# EAGLE board boardpov (EAGLE 8.4.0)

Size 225 x 38 mm. Coordinates in mm from the lower left corner, seen from the top.
Outline: 0,0 225,0 225,38 0,38 0,0
Copper layers (1*16): Top 0.035mm / dielectric 1.5mm / Bottom 0.035mm
Design rules "default": minimum track width 6mil, minimum drill 0.35mm, track to track 6mil, track to pad 6mil, pad to pad 6mil, via to via 6mil, smd to smd 6mil, copper to edge 40mil, drill to drill 6mil, minimum pad ring 10mil, minimum via ring 8mil, stop-mask expansion 4mil, vias tented up to drill 0mil, thermal gap 10mil

## Footprints (pad centres in the part's own frame; a part is rotated, then mirrored left to right if it is on the bottom)
C025-025X050 = drill 0.813 pad 1.676 octagon: 1 -1.27,0; 2 1.27,0
1X02 = drill 1.016 pad 1.88: 1 0,0; 2 2.54,0
1X03 = drill 1.016 long: 1 -2.54,0; 2 0,0; 3 2.54,0
1X06-CLEANBIG = drill 1.016 pad 1.778 octagon: 1 -6.35,0; 2 -3.81,0; 3 -1.27,0; 4 1.27,0; 5 3.81,0; 6 6.35,0
PHOTON = drill 1.016 pad 1.88: 1 1.27,32.258; 2 1.27,29.718; 3 1.27,27.178; 4 1.27,24.638; 5 1.27,22.098; 6 1.27,19.558; 7 1.27,17.018; 8 1.27,14.478; 9 1.27,11.938; 10 1.27,9.398; 11 1.27,6.858; 12 1.27,4.318; 13 19.05,4.318; 14 19.05,6.858; 15 19.05,9.398; 16 19.05,11.938; 17 19.05,14.478; 18 19.05,17.018; 19 19.05,19.558; 20 19.05,22.098; 21 19.05,24.638; 22 19.05,27.178; 23 19.05,29.718; 24 19.05,32.258
APA102-2020 = smd 0.8 x 0.3 bottom: CK0 2.14,1.27; CKL 0.4,1.27 | smd 0.8 x 0.5 bottom: GND 0.4,2.14; SD0 2.14,0.4; SD1 0.4,0.4; VDD 2.14,2.14 | smd 0.5 x 1.48: GND- 1.27,0.7 | smd 0.5 x 1: VDD+ 1.27,2.14

## Placement (x,y rotation side)
C1  [C025-025X050]  220.2,5.4 90 top
J1  [1X02]  8.9,-13.7 0 top  (outside the outline)
JP1  [1X03]  219.7,30.5 270 top
JP2  [1X06-CLEANBIG]  213.64,13.04 180 top
JP5  [1X06-CLEANBIG]  213.64,23.2 180 top
U$1  PHOTON_WITH_HEADERS  [PHOTON]  41.08,8.89 90 top
U$2  APA102-202020-20  [APA102-2020]  206.4,17.3 0 top
U$3  APA102-202020-20  [APA102-2020]  201.9,17.3 0 top
U$4  APA102-202020-20  [APA102-2020]  197.4,17.3 0 top
U$5  APA102-202020-20  [APA102-2020]  192.9,17.3 0 top
U$6  APA102-202020-20  [APA102-2020]  188.4,17.3 0 top
U$7  APA102-202020-20  [APA102-2020]  183.9,17.3 0 top
U$8  APA102-202020-20  [APA102-2020]  179.4,17.3 0 top
U$9  APA102-202020-20  [APA102-2020]  174.9,17.3 0 top
U$10  APA102-202020-20  [APA102-2020]  170.4,17.3 0 top
U$11  APA102-202020-20  [APA102-2020]  165.9,17.3 0 top
U$12  APA102-202020-20  [APA102-2020]  161.4,17.3 0 top
U$13  APA102-202020-20  [APA102-2020]  156.9,17.3 0 top
U$14  APA102-202020-20  [APA102-2020]  152.4,17.3 0 top
U$15  APA102-202020-20  [APA102-2020]  147.9,17.3 0 top
U$16  APA102-202020-20  [APA102-2020]  143.4,17.3 0 top
U$17  APA102-202020-20  [APA102-2020]  138.9,17.3 0 top
U$18  APA102-202020-20  [APA102-2020]  134.4,17.3 0 top
U$19  APA102-202020-20  [APA102-2020]  129.9,17.3 0 top
U$20  APA102-202020-20  [APA102-2020]  125.4,17.3 0 top
U$21  APA102-202020-20  [APA102-2020]  120.9,17.3 0 top
U$22  APA102-202020-20  [APA102-2020]  116.4,17.3 0 top
U$23  APA102-202020-20  [APA102-2020]  111.9,17.3 0 top
U$24  APA102-202020-20  [APA102-2020]  107.4,17.3 0 top
U$25  APA102-202020-20  [APA102-2020]  102.9,17.3 0 top
U$26  APA102-202020-20  [APA102-2020]  98.4,17.3 0 top
U$27  APA102-202020-20  [APA102-2020]  93.9,17.3 0 top
U$28  APA102-202020-20  [APA102-2020]  89.4,17.3 0 top
U$29  APA102-202020-20  [APA102-2020]  84.9,17.3 0 top
U$30  APA102-202020-20  [APA102-2020]  80.4,17.3 0 top
U$31  APA102-202020-20  [APA102-2020]  75.9,17.3 0 top
U$41  APA102-202020-20  [APA102-2020]  219.9,17.3 0 top
U$42  APA102-202020-20  [APA102-2020]  215.4,17.3 0 top
U$43  APA102-202020-20  [APA102-2020]  210.9,17.3 0 top
U$44  APA102-202020-20  [APA102-2020]  71.4,17.3 0 top
U$45  APA102-202020-20  [APA102-2020]  66.9,17.3 0 top
U$46  APA102-202020-20  [APA102-2020]  62.4,17.3 0 top
U$47  APA102-202020-20  [APA102-2020]  57.9,17.3 0 top
U$48  APA102-202020-20  [APA102-2020]  53.4,17.3 0 top
U$49  APA102-202020-20  [APA102-2020]  48.9,17.3 0 top

## Library data of the parts
C1 JP2 JP5 = adafruit
J1 = SparkFun-Connectors
JP1 = pinhead
U$1 = Spark
U$2-U$31 U$41-U$49 = POVPARTS

## Nets
3V3: U$1.24
N$1: J1.2 U$1.1
N$2: J1.1 U$1.2 U$1.21 U$2.GND U$2.GND- U$3.GND U$3.GND- U$4.GND U$4.GND- U$5.GND U$5.GND- U$6.GND U$6.GND- U$7.GND U$7.GND- U$8.GND U$8.GND- U$9.GND U$9.GND- U$10.GND U$10.GND- U$11.GND U$11.GND- U$12.GND U$12.GND- U$13.GND U$13.GND- U$14.GND U$14.GND- U$15.GND U$15.GND- U$16.GND U$16.GND- U$17.GND U$17.GND- U$18.GND U$18.GND- U$19.GND U$19.GND- U$20.GND U$20.GND- U$21.GND U$21.GND- U$22.GND U$22.GND- U$23.GND U$23.GND- U$24.GND U$24.GND- U$25.GND U$25.GND- U$26.GND U$26.GND- U$27.GND U$27.GND- U$28.GND U$28.GND- U$29.GND U$29.GND- U$30.GND U$30.GND- U$31.GND U$31.GND- U$41.GND U$41.GND- U$42.GND U$42.GND- U$43.GND U$43.GND- U$44.GND U$44.GND- U$45.GND U$45.GND- U$46.GND U$46.GND- U$47.GND U$47.GND- U$48.GND U$48.GND- U$49.GND U$49.GND-
N$3: U$2.VDD U$2.VDD+ U$3.VDD U$3.VDD+ U$4.VDD U$4.VDD+ U$5.VDD U$5.VDD+ U$6.VDD U$6.VDD+ U$7.VDD U$7.VDD+ U$8.VDD U$8.VDD+ U$9.VDD U$9.VDD+ U$10.VDD U$10.VDD+ U$11.VDD U$11.VDD+ U$12.VDD U$12.VDD+ U$13.VDD U$13.VDD+ U$14.VDD U$14.VDD+ U$15.VDD U$15.VDD+ U$16.VDD U$16.VDD+ U$17.VDD U$17.VDD+ U$18.VDD U$18.VDD+ U$19.VDD U$19.VDD+ U$20.VDD U$20.VDD+ U$21.VDD U$21.VDD+ U$22.VDD U$22.VDD+ U$23.VDD U$23.VDD+ U$24.VDD U$24.VDD+ U$25.VDD U$25.VDD+ U$26.VDD U$26.VDD+ U$27.VDD U$27.VDD+ U$28.VDD U$28.VDD+ U$29.VDD U$29.VDD+ U$30.VDD U$30.VDD+ U$31.VDD U$31.VDD+ U$41.VDD U$41.VDD+ U$42.VDD U$42.VDD+ U$43.VDD U$43.VDD+ U$44.VDD U$44.VDD+ U$45.VDD U$45.VDD+ U$46.VDD U$46.VDD+ U$47.VDD U$47.VDD+ U$48.VDD U$48.VDD+ U$49.VDD U$49.VDD+
N$4: U$48.SD1 U$49.SD0
N$5: U$48.CKL U$49.CK0
N$6: U$47.CKL U$48.CK0
N$7: U$47.SD1 U$48.SD0
N$8: U$46.SD1 U$47.SD0
N$9: U$46.CKL U$47.CK0
N$10: U$45.CKL U$46.CK0
N$11: U$45.SD1 U$46.SD0
N$12: U$44.CKL U$45.CK0
N$13: U$44.SD1 U$45.SD0
N$14: U$26.SD1 U$44.SD0
N$15: U$26.CKL U$44.CK0
N$16: U$26.SD0 U$27.SD1
N$17: U$26.CK0 U$27.CKL
N$18: U$27.CK0 U$28.CKL
N$19: U$27.SD0 U$28.SD1
N$20: U$28.CK0 U$29.CKL
N$21: U$28.SD0 U$29.SD1
N$22: U$29.CK0 U$30.CKL
N$23: U$29.SD0 U$30.SD1
N$24: U$30.SD0 U$31.SD1
N$25: U$30.CK0 U$31.CKL
N$26: U$25.SD1 U$31.SD0
N$27: U$25.CKL U$31.CK0
N$28: U$20.CKL U$21.CK0
N$29: U$20.SD1 U$21.SD0
N$30: U$21.SD1 U$22.SD0
N$31: U$21.CKL U$22.CK0
N$32: U$22.CKL U$23.CK0
N$33: U$22.SD1 U$23.SD0
N$34: U$23.SD1 U$24.SD0
N$35: U$23.CKL U$24.CK0
N$36: U$24.CKL U$25.CK0
N$37: U$24.SD1 U$25.SD0
N$38: U$14.SD1 U$20.CK0
N$39: U$14.CKL U$20.SD0
N$40: U$14.CK0 U$15.CKL
N$41: U$14.SD0 U$15.SD1
N$42: U$15.CK0 U$16.CKL
N$43: U$15.SD0 U$16.SD1
N$44: U$16.CK0 U$17.CKL
N$45: U$16.SD0 U$17.SD1
N$46: U$17.CK0 U$18.CKL
N$47: U$17.SD0 U$18.SD1
N$48: U$18.CK0 U$19.CKL
N$49: U$18.SD0 U$19.SD1
N$50: U$13.SD1 U$19.SD0
N$51: U$13.CKL U$19.CK0
N$52: U$8.CKL U$9.CK0
N$53: U$8.SD1 U$9.SD0
N$54: U$9.SD1 U$10.SD0
N$55: U$9.CKL U$10.CK0
N$56: U$10.CKL U$11.CK0
N$57: U$10.SD1 U$11.SD0
N$58: U$11.SD1 U$12.SD0
N$59: U$11.CKL U$12.CK0
VBAT: U$1.22

## Tracks (layer width: path | path; a pad name or v marks a point on that pad's centre or on a via)
N$1  (1 unrouted)
N$2  (80 unrouted)
N$3  (77 unrouted)
N$4  (1 unrouted)
N$5  (1 unrouted)
N$6  (1 unrouted)
N$7  (1 unrouted)
N$8  (1 unrouted)
N$9  (1 unrouted)
N$10  (1 unrouted)
N$11  (1 unrouted)
N$12  (1 unrouted)
N$13  (1 unrouted)
N$14  (1 unrouted)
N$15  (1 unrouted)
N$16  (1 unrouted)
N$17  (1 unrouted)
N$18  (1 unrouted)
N$19  (1 unrouted)
N$20  (1 unrouted)
N$21  (1 unrouted)
N$22  (1 unrouted)
N$23  (1 unrouted)
N$24  (1 unrouted)
N$25  (1 unrouted)
N$26  (1 unrouted)
N$27  (1 unrouted)
N$28  (1 unrouted)
N$29  (1 unrouted)
N$30  (1 unrouted)
N$31  (1 unrouted)
N$32  (1 unrouted)
N$33  (1 unrouted)
N$34  (1 unrouted)
N$35  (1 unrouted)
N$36  (1 unrouted)
N$37  (1 unrouted)
N$38  (1 unrouted)
N$39  (1 unrouted)
N$40  (1 unrouted)
N$41  (1 unrouted)
N$42  (1 unrouted)
N$43  (1 unrouted)
N$44  (1 unrouted)
N$45  (1 unrouted)
N$46  (1 unrouted)
N$47  (1 unrouted)
N$48  (1 unrouted)
N$49  (1 unrouted)
N$50  (1 unrouted)
N$51  (1 unrouted)
N$52  (1 unrouted)
N$53  (1 unrouted)
N$54  (1 unrouted)
N$55  (1 unrouted)
N$56  (1 unrouted)
N$57  (1 unrouted)
N$58  (1 unrouted)
N$59  (1 unrouted)